# Altium PCB PCB1.PcbDoc
Units mil, origin at the board's own origin, x right, y up, seen from the top; angles counter-clockwise.
Board outline 7035.03 x 5525.03 mil, 2 copper layers (Top Layer, Bottom Layer); 52 components, 110 nets, 324 pads, 2 vias.
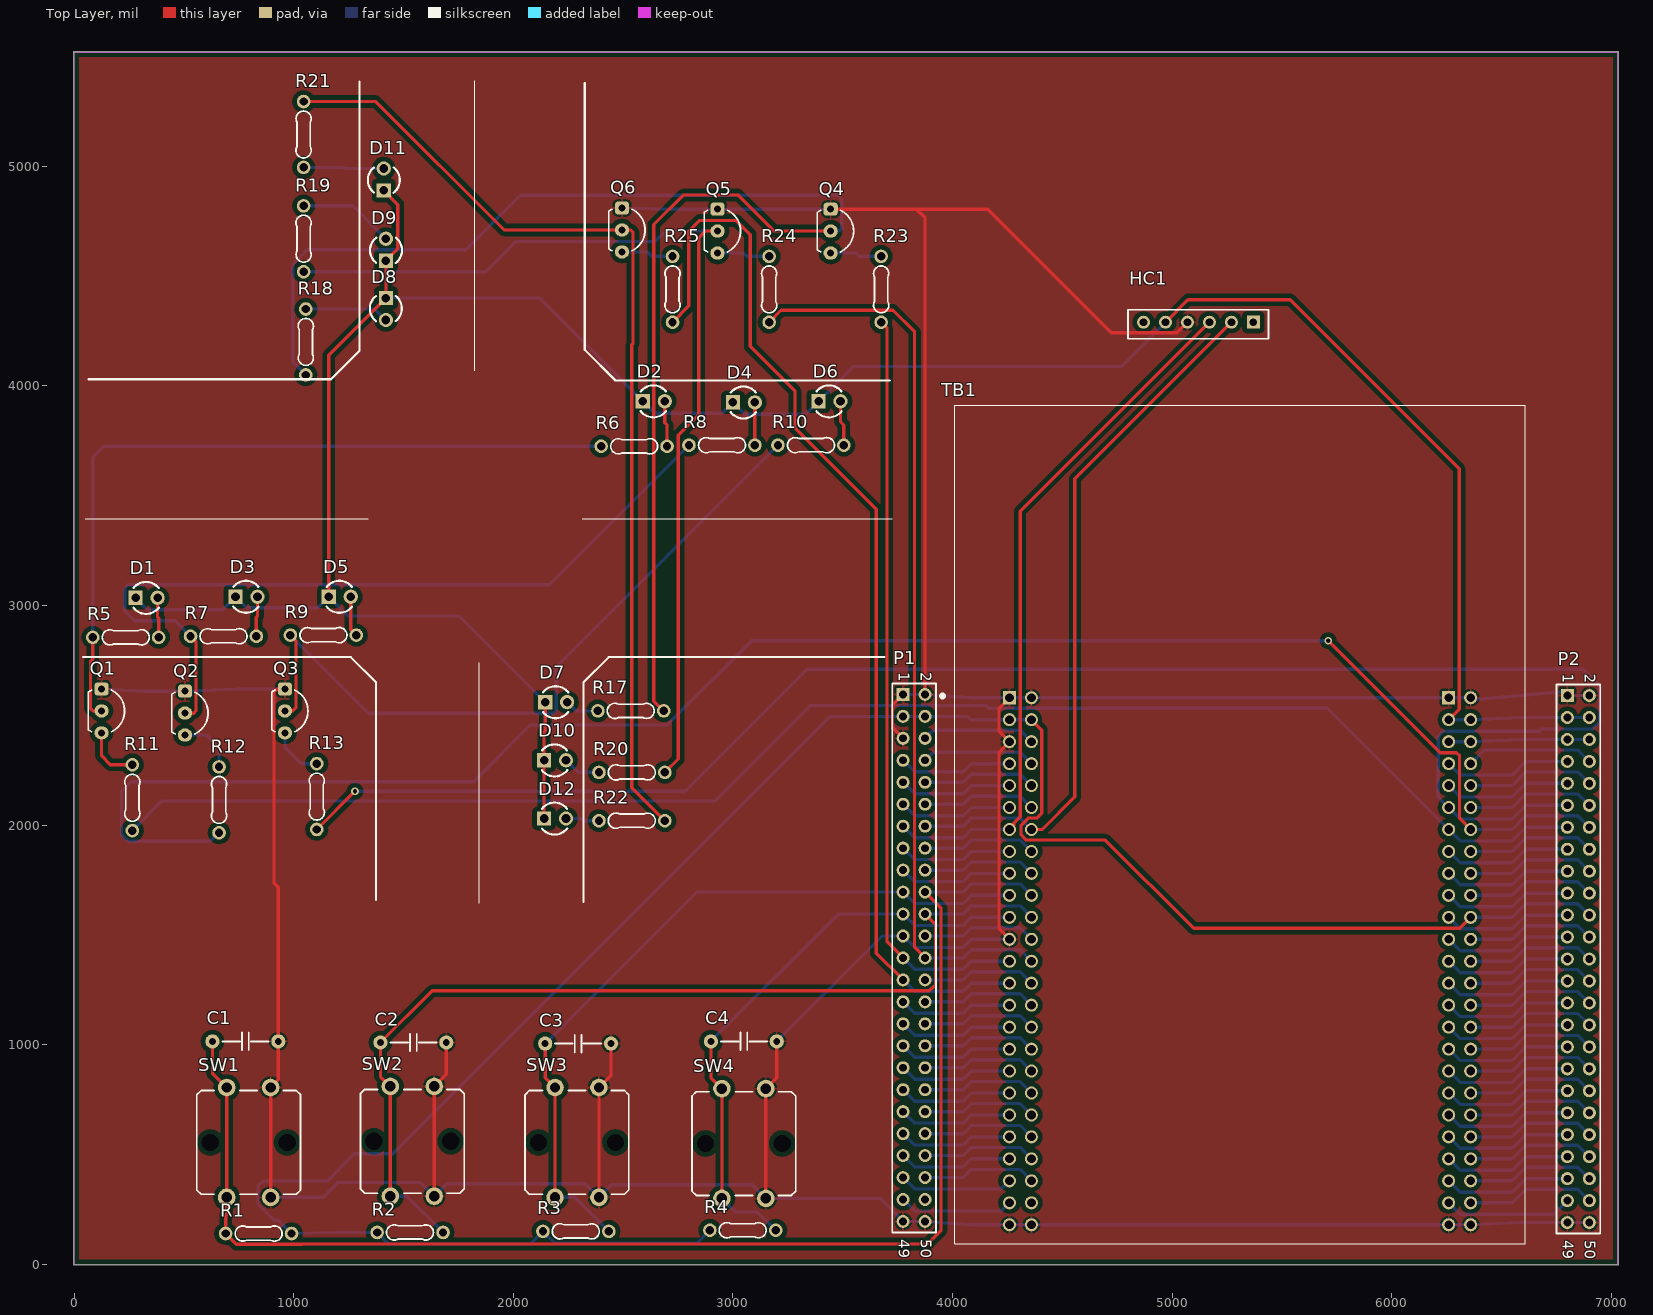
[diagram p0: Top Layer view]
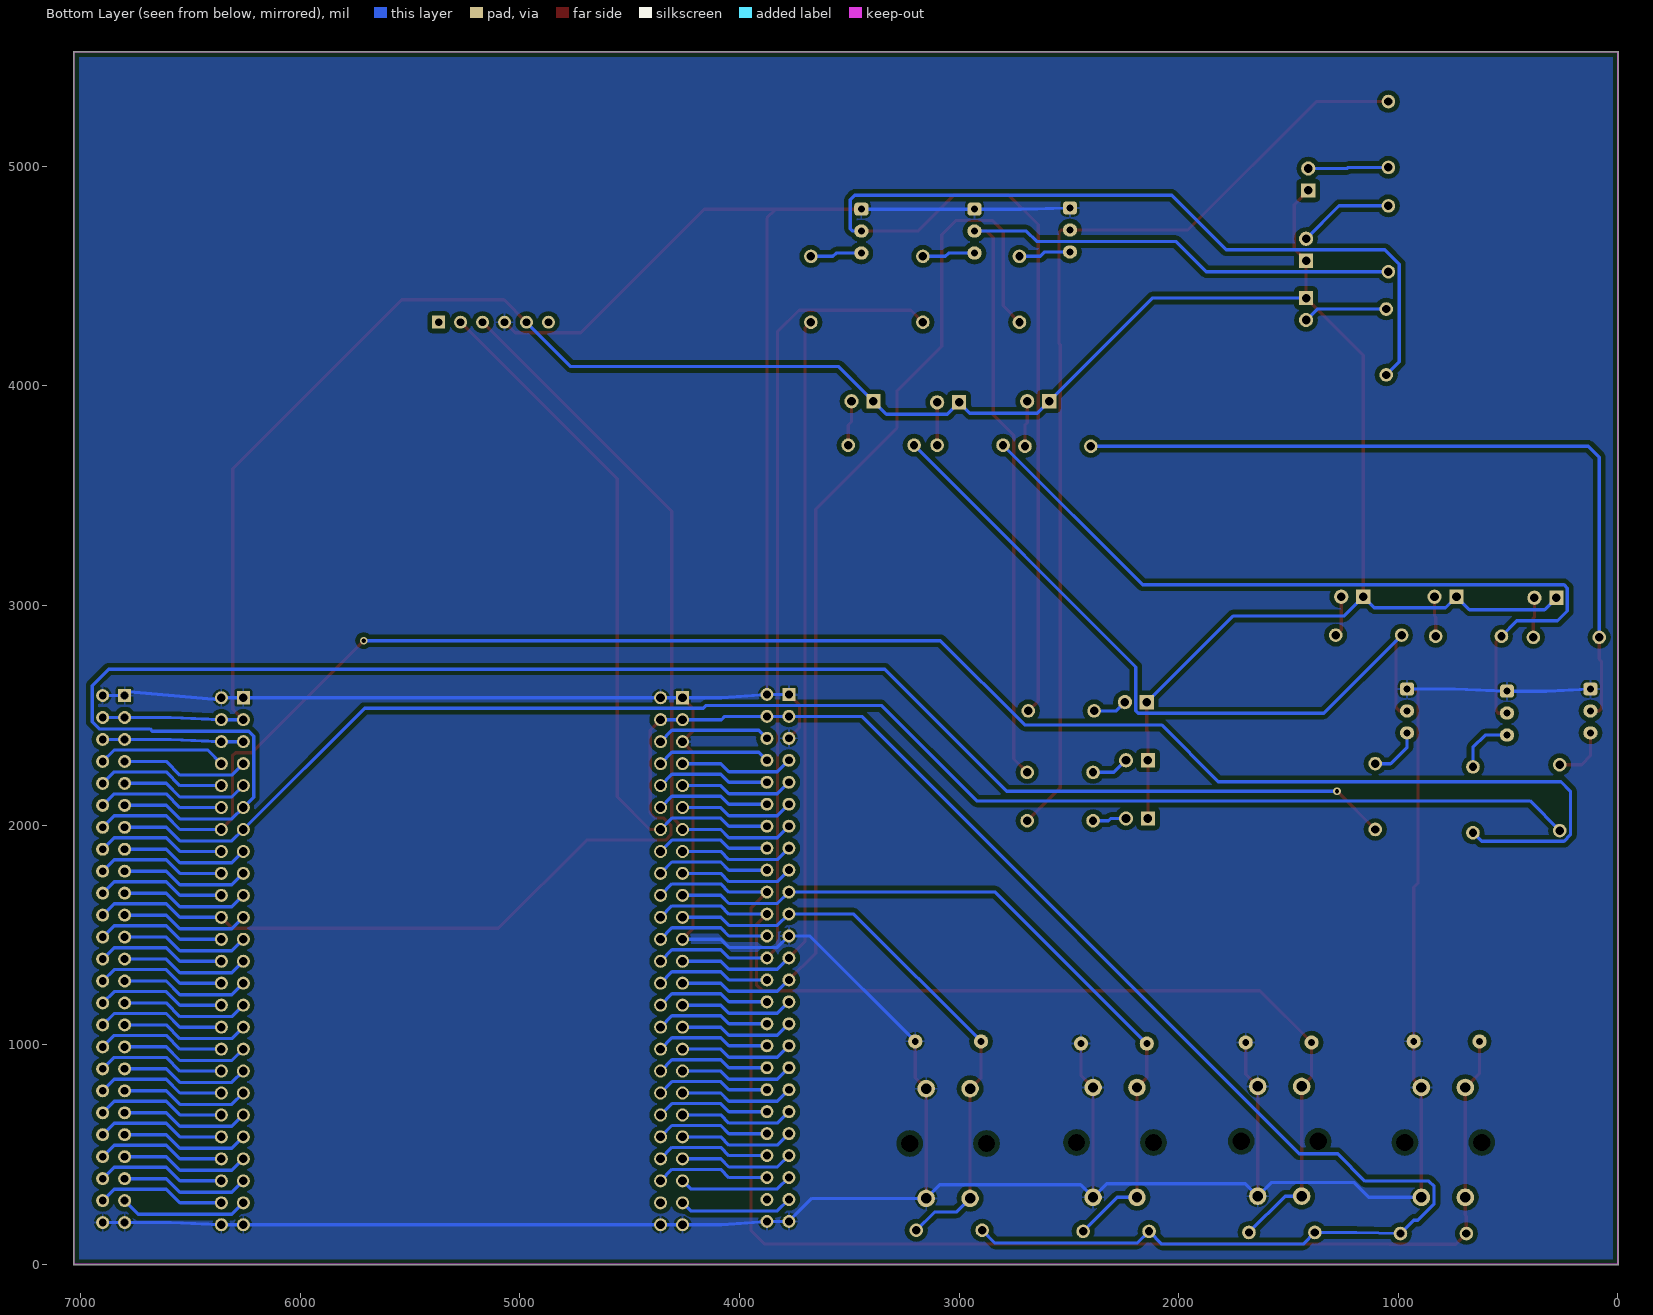
[diagram p1: Bottom Layer view, seen from below]
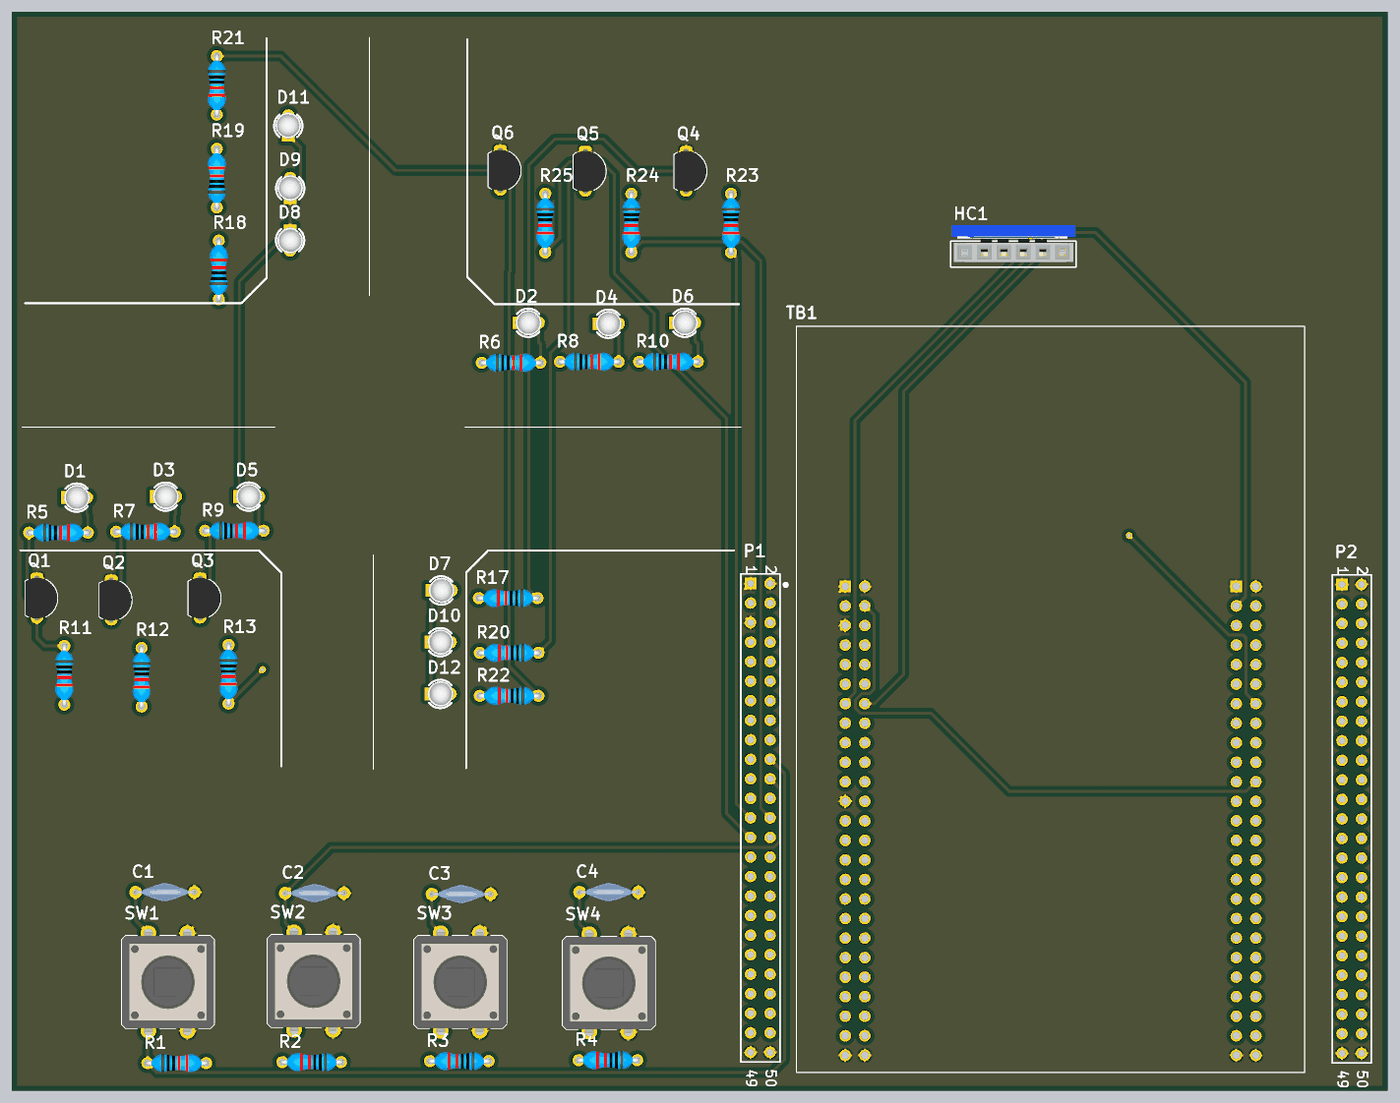
[diagram p2: 3D render of the assembled board from above, using the file's embedded part models]

## Layer stack, top to bottom
Top Solder: solder mask 0.4, Solder Resist, Dk 3.5
Top Layer: signal copper 1.4
Dielectric 1: dielectric 12.6, FR-4, Dk 4.8
Bottom Layer: signal copper 1.4
Bottom Solder: solder mask 0.4, Solder Resist, Dk 3.5

## Board outline
-2.51,0 ccw(c0,0) 0,-2.52 7030,-2.52 ccw(c7030,0) 7032.51,0 7032.51,5520 ccw(c7030,5520) 7030,5522.52 0,5522.52 ccw(c0,5520) -2.51,5520

## Design rules (kind name [scope] priority, off if disabled: settings)
Clearance [All] p1: gap=20 ignorepadtopadclearanceinfootprint=FALSE
PolygonConnect [All] p1: connectstyle=Relief reliefconductorwidth=10 reliefentries=4 polygonreliefangle="90 Angle" airgapwidth=10
RoutingVias [All] p1: holewidth=20 width=35 viastyle="Through Hole" minholewidth=15 minwidth=25 maxholewidth=28 maxwidth=50
SolderMaskExpansion [All] p1: expansion=4
Width [All] p1: maxlimit=40 minlimit=10 preferedwidth=15
30 further rules are at their usual default settings.

## Components (designator, comment, footprint, x,y, rotation, side; value= is the part's Value field where it differs from the comment)
C1 "104" "CAP Ceramic/W300" 630,1015 r0 top
C2 "104" "CAP Ceramic/W300" 1395,1010 r0 top
C3 "104" "CAP Ceramic/W300" 2145,1005 r0 top
C4 "104" "CAP Ceramic/W300" 2900,1015 r0 top
D1 "Led" "LED 3MM - green" 330,3035 r0 top
D2 "Led" "LED 3MM - green" 2640,3930 r0 top
D3 "Led" "LED 3MM - yellow" 785,3040 r0 top
D4 "Led" "LED 3MM - yellow" 3050,3925 r0 top
D5 "Led" "LED 3MM - red" 1210,3040 r0 top
D6 "Led" "LED 3MM - red" 3440,3930 r0 top
D7 "Led" "LED 3MM - green" 2195,2560 r0 top
D8 "Led" "LED 3MM - green" 1420,4350 r270 top
D9 "Led" "LED 3MM - yellow" 1420,4620 r90 top
D10 "Led" "LED 3MM - yellow" 2190,2295 r0 top
D11 "Led" "LED 3MM - red" 1410,4940 r90 top
D12 "Led" "LED 3MM - red" 2190,2030 r0 top
HC1 "HC05 Bluetooth" "HC05 Bluethooth Dung" 5370,4290 r180 top value="Connector 6"
P1 "Header 25X2" HDR2X25 3775,2595 r270 top
P2 "Header 25X2" HDR2X25 6800,2590 r270 top
Q1 "Transistor NPN" TO-92/W100 125,2520 r270 top
Q2 "Transistor NPN" TO-92/W100 505,2510 r270 top
Q3 "Transistor NPN" TO-92/W100 960,2520 r270 top
Q4 "Transistor NPN" TO-92/W100 3445,4705 r270 top
Q5 "Transistor NPN" TO-92/W100 2930,4705 r270 top
Q6 "Transistor NPN" TO-92/W100 2495,4710 r270 top
R1 "10k" "R 1/4W/300" 690,140 r0 top
R2 "10k" "R 1/4W/300" 1680,145 r180 top
R3 "10k" "R 1/4W/300" 2435,150 r180 top
R4 "10k" "R 1/4W/300" 3195,155 r180 top
R5 "220" "R 1/4W/300" 85,2855 r0 top
R6 "220" "R 1/4W/300" 2400,3725 r0 top
R7 "220" "R 1/4W/300" 530,2860 r0 top
R8 "220" "R 1/4W/300" 2800.01,3730 r0 top
R9 "220" "R 1/4W/300" 985,2865 r0 top
R10 "220" "R 1/4W/300" 3205,3730 r0 top
R11 "1k" "R 1/4W/300" 265,2275 r270 top
R12 "1k" "R 1/4W/300" 660,2265 r270 top
R13 "1k" "R 1/4W/300" 1105,2280 r270 top
R17 "220" "R 1/4W/300" 2685,2520 r180 top
R18 "220" "R 1/4W/300" 1055,4050 r90 top
R19 "220" "R 1/4W/300" 1045,4520 r90 top
R20 "220" "R 1/4W/300" 2690,2240 r180 top
R21 "220" "R 1/4W/300" 1045,5295 r270 top
R22 "220" "R 1/4W/300" 2690,2020 r180 top
R23 "1k" "R 1/4W/300" 3675,4590 r270 top
R24 "1k" "R 1/4W/300" 3165,4590 r270 top
R25 "1k" "R 1/4W/300" 2725,4590 r270 top
SW1 "Button" SW/4/12mm 795,555 r0 top
SW2 "Button" SW/4/12mm 1540,560 r0 top
SW3 "Button" SW/4/12mm 2290,555 r0 top
SW4 "Button" SW/4/12mm 3050,550 r0 top
TB1 "STM32F4DISCOVERY" MODULE_STM32F4DISCOVERY 5309.42,2002.05 r0 top

## Footprints (in the part's own frame and the unit in brackets; to place one, negate y for a bottom-side part, rotate by r counter-clockwise, add the part's x,y. Pads: shape width x height; smd on the part's side, far side on the other; paste and mask are expansions set on the pad)
"CAP Ceramic/W300" [mil]
  round 65 hole 31: 1(0,0) 2(300,0)
  silkscreen extent 45,-40 255,40, body extent -8,-47 307,47, height 340
"HC05 Bluethooth Dung" [mm] "Connector; Header; 6 Position"
  rect 1.5x1.5 hole 0.9: 1(0,0)
  round 1.5 hole 0.9: 2(2.54,0) 3(5.08,0) 4(7.62,0) 5(10.16,0) 6(12.7,0)
  silkscreen extent -1.76,-1.46 14.51,1.91, body extent -1.65,-3.56 14.35,1.26, height 38
HDR2X25 [mm] "Connector; Header; 25x2 Position"
  rect 1.5x1.5 hole 0.9: 1(0,0)
  round 1.5 hole 0.9: 2(0,2.54) 3(2.54,0) 4(2.54,2.54) 5(5.08,0) 6(5.08,2.54) 7(7.62,0) 8(7.62,2.54) 9(10.16,0) 10(10.16,2.54) 11(12.7,0) 12(12.7,2.54) 13(15.24,0) 14(15.24,2.54) 15(17.78,0) 16(17.78,2.54) 17(20.32,0) 18(20.32,2.54) 19(22.86,0) 20(22.86,2.54) 21(25.4,0) 22(25.4,2.54) 23(27.94,0) 24(27.94,2.54) 25(30.48,0) 26(30.48,2.54) 27(33.02,0) 28(33.02,2.54) 29(35.56,0) 30(35.56,2.54) 31(38.1,0) 32(38.1,2.54) 33(40.64,0) 34(40.64,2.54) 35(43.18,0) 36(43.18,2.54) 37(45.72,0) 38(45.72,2.54) 39(48.26,0) 40(48.26,2.54) 41(50.8,0) 42(50.8,2.54) 43(53.34,0) 44(53.34,2.54) 45(55.88,0) 46(55.88,2.54) 47(58.42,0) 48(58.42,2.54) 49(60.96,0) 50(60.96,2.54)
  silkscreen extent -1.27,-1.27 62.23,3.81
"LED 3MM - green" [mil]
  rect 65x65 hole 39: 1(-50,0)
  round 65 hole 39: 2(50,0)
  silkscreen extent -60,-73 55,72, body extent -66,-65 64,65, height 207
"LED 3MM - red" [mil]
  rect 65x65 hole 39: 1(-50,0)
  round 65 hole 39: 2(50,0)
  silkscreen extent -60,-73 55,72, body extent -66,-65 64,65, height 207
"LED 3MM - yellow" [mil]
  rect 65x65 hole 39: 1(-50,0)
  round 65 hole 39: 2(50,0)
  silkscreen extent -60,-73 55,72, body extent -66,-65 64,65, height 207
MODULE_STM32F4DISCOVERY [mm]
  rect 1.508x1.508 hole 1: P1_1(-26.67,14.68) P2_1(24.13,14.68)
  round 1.508 hole 1: P1_2(-24.13,14.68) P1_3(-26.67,12.14) P1_4(-24.13,12.14) P1_5(-26.67,9.6) P1_6(-24.13,9.6) P1_7(-26.67,7.06) P1_8(-24.13,7.06) P1_9(-26.67,4.52) P1_10(-24.13,4.52) P1_11(-26.67,1.98) P1_12(-24.13,1.98) P1_13(-26.67,-0.56) P1_14(-24.13,-0.56) P1_15(-26.67,-3.1) P1_16(-24.13,-3.1) P1_17(-26.67,-5.64) P1_18(-24.13,-5.64) P1_19(-26.67,-8.18) P1_20(-24.13,-8.18) P1_21(-26.67,-10.72) P1_22(-24.13,-10.72) P1_23(-26.67,-13.26) P1_24(-24.13,-13.26) P1_25(-26.67,-15.8) P1_26(-24.13,-15.8) P1_27(-26.67,-18.34) P1_28(-24.13,-18.34) P1_29(-26.67,-20.88) P1_30(-24.13,-20.88) P1_31(-26.67,-23.42) P1_32(-24.13,-23.42) P1_33(-26.67,-25.96) P1_34(-24.13,-25.96) P1_35(-26.67,-28.5) P1_36(-24.13,-28.5) P1_37(-26.67,-31.04) P1_38(-24.13,-31.04) P1_39(-26.67,-33.58) P1_40(-24.13,-33.58) P1_41(-26.67,-36.12) P1_42(-24.13,-36.12) P1_43(-26.67,-38.66) P1_44(-24.13,-38.66) P1_45(-26.67,-41.2) P1_46(-24.13,-41.2) P1_47(-26.67,-43.74) P1_48(-24.13,-43.74) P1_49(-26.67,-46.28) P1_50(-24.13,-46.28) P2_2(26.67,14.68) P2_3(24.13,12.14) P2_4(26.67,12.14) P2_5(24.13,9.6) P2_6(26.67,9.6) P2_7(24.13,7.06) P2_8(26.67,7.06) P2_9(24.13,4.52) P2_10(26.67,4.52) P2_11(24.13,1.98) P2_12(26.67,1.98) P2_13(24.13,-0.56) P2_14(26.67,-0.56) P2_15(24.13,-3.1) P2_16(26.67,-3.1) P2_17(24.13,-5.64) P2_18(26.67,-5.64) P2_19(24.13,-8.18) P2_20(26.67,-8.18) P2_21(24.13,-10.72) P2_22(26.67,-10.72) P2_23(24.13,-13.26) P2_24(26.67,-13.26) P2_25(24.13,-15.8) P2_26(26.67,-15.8) P2_27(24.13,-18.34) P2_28(26.67,-18.34) P2_29(24.13,-20.88) P2_30(26.67,-20.88) P2_31(24.13,-23.42) P2_32(26.67,-23.42) P2_33(24.13,-25.96) P2_34(26.67,-25.96) P2_35(24.13,-28.5) P2_36(26.67,-28.5) P2_37(24.13,-31.04) P2_38(26.67,-31.04) P2_39(24.13,-33.58) P2_40(26.67,-33.58) P2_41(24.13,-36.12) P2_42(26.67,-36.12) P2_43(24.13,-38.66) P2_44(26.67,-38.66) P2_45(24.13,-41.2) P2_46(26.67,-41.2) P2_47(24.13,-43.74) P2_48(26.67,-43.74) P2_49(24.13,-46.28) P2_50(26.67,-46.28)
  silkscreen extent -34.61,-48.5 33,48.5
"R 1/4W/300" [mil] "Through hole resitor, axial 300mils, 1/4W"
  round 62 hole 38: 1(0,0) 2(300,0)
  silkscreen extent 44,-35 257,35, body extent -12,-47 312,47, height 97
SW/4/12mm [mil]
  round 80 hole 47.24: 1(-100,250) 2(-100,-250) 3(100,-250) 4(100,250)
  round 0 hole 78.74: HOLE(-175,0) HOLE(175,0)
  silkscreen extent -236,-236 236,236, body extent -236,-257 236,255, height 287
TO-92/W100 [mil]
  rrect50% 60x65 hole 31: 1(-100,0)
  oval 60x65 hole 31: 2(0,0) 3(100,0)
  silkscreen extent -95,-60 95,105, body extent -114,-60 112,105, height 370

## Part data
C1 C2 C3 C4: library part "Capacitor NP", "Capacitor non-pol"
D1 D2 D3 D4 D5 D6 D7 D8 D9 D10 D11 D12: "Typical LED"
HC1: "Bluetooth HC05"
P1 P2: "Header, 25-Pin, Dual row", LatestRevisionDate=17-Jul-2002, LatestRevisionNote="Re-released for DXP Platform.", Publisher="Altium Limited"
Q1 Q2 Q3 Q4 Q5 Q6: "NPN Bipolar Transistor"
R1 R2 R3 R4 R5 R6 R7 R8 R9 R10 R11 R12 R13 R17 R18 R19 R20 R21 R22 R23 R24 R25: library part Resistor, "Resistor"
SW1 SW2 SW3 SW4: library part "SW SPST 4-pin", "Tact switch 4-pin"
TB1: "Development kit: ARM ST; pin strips, pin header; No.of", PACKAGE=None, Availability=Unavailable, MP=STM32F4DISCOVERY, Price=None

## Via types
v1: diameter 35, hole 20, Top Layer to Bottom Layer, 2 vias

## Nets (pads, with @x,y where several pads share a name; then routed paths per layer and width w, separated by ;. In a path a pad name is that pad's centre, name@x,y a point inside that pad or via, vN(x,y) a via of type N, cw(c..) or ccw(c..) an arc to the next point about the centre after c; other vN are vias at no path point)
3V: P2.5 P2.6 TB1.P2_5 TB1.P2_6 | length 640.8
  Bottom Layer w15: TB1.P2_5 TB1.P2_6 6590,2390 P2.5 P2.6
5V: D1.1 D2.1 D3.1 D4.1 D5.1 D6.1 D7.1 D8.1 D9.1 D10.1 D11.1 D12.1 HC1.5 P2.3 P2.4 TB1.P2_3 TB1.P2_4 | length 12175.2
  Top Layer w15: D5.1 1160,4140 D8.1 D9.1 1474,4624 1474,4826 D11.1 ; D12.1 D10.1 2140,2425 2145,2430 D7.1 ; HC1.5 5072,4392 5538,4392 6307,3623 6307,2527.58 TB1.P2_3
  Bottom Layer w15: D1.1 334,2981 676,2981 D3.1 785,2990 1110,2990 D5.1 1248,2952 1753,2952 D7.1 ; D8.1 2120,4400 D2.1 2644,3876 2951,3876 D4.1 3054,3871 3331,3871 D6.1 3548,4088 4768,4088 HC1.5 ; TB1.P2_3 TB1.P2_4 6590,2490 P2.3 P2.4
BOOT0: P2.21 TB1.P2_21 | length 587.8
  Bottom Layer w15: TB1.P2_21 6311.42,1528 6548,1528 6610,1590 P2.21
GND: C1.2 C2.2 C3.2 C4.2 HC1.4 P1.1 P1.2 P1.5 P1.23 P1.49 P1.50 P2.1 P2.2 P2.49 P2.50 Q1.1 Q2.1 Q3.1 Q4.1 Q5.1 Q6.1 SW1.3 SW1.4 SW2.3 SW2.4 SW3.3 SW3.4 SW4.3 SW4.4 TB1.P1_1 TB1.P1_2 TB1.P1_5 TB1.P1_23 TB1.P1_49 TB1.P1_50 TB1.P2_1 TB1.P2_2 TB1.P2_49 TB1.P2_50 | length 22501.8
  Top Layer w15: SW1.3 SW1.4 930,840 C1.2 930,1717 910,1737 910,2605 925,2620 Q3.1 ; SW2.3 SW2.4 1695,865 C2.2 ; SW3.3 SW3.4 2445,860 C3.2 ; SW4.3 SW4.4 3200,850 C4.2 ; Q4.1 3835,4805 ; P1.5 3727,2443 3727,2547 P1.1 ; P1.2 3875,4765 3835,4805 ; TB1.P1_23 4212,1527.42 4212,2332.58 TB1.P1_5 4212,2427.42 4212,2532.58 TB1.P1_1 ; HC1.4 5022,4242 4723,4242 4160,4805 3835,4805
  Bottom Layer w15: Q1.1 325,2610 Q2.1 743,2620 Q3.1 ; SW1.3 1134,305 1201,372 1578,372 SW2.3 1697,367 2328,367 SW3.3 2447,362 3088,362 SW4.3 3670,300 P1.49 P1.50 4082,180 TB1.P1_49 TB1.P1_50 TB1.P2_49 TB1.P2_50 6590,190 P2.49 P2.50 ; Q6.1 2718,4805 Q5.1 Q4.1 ; C4.2 3680,1495 P1.23 3827,1443 4048,1443 4085,1480 TB1.P1_23 ; P1.1 P1.2 4082,2580 TB1.P1_1 TB1.P1_2 TB1.P2_1 TB1.P2_2 6368.77,2571.42 6779.61,2607.13 P2.1 P2.2
NetD1_2: D1.2 R5.2 | length 182.1
  Top Layer w15: D1.2 380,2947 385,2942 R5.2
NetD2_2: D2.2 R6.2 | length 209.1
  Top Layer w15: D2.2 2690,3832 2700,3822 R6.2
NetD3_2: D3.2 R7.2 | length 182.1
  Top Layer w15: R7.2 830,2947 835,2952 D3.2
NetD4_2: D4.2 R8.2 | length 195
  Top Layer w15: R8.2 3100.01,3827 D4.2
NetD5_2: D5.2 R9.2 | length 185.4
  Top Layer w15: D5.2 1260,2890 R9.2
NetD6_2: D6.2 R10.2 | length 206.2
  Top Layer w15: D6.2 3490,3837 3505,3822 R10.2
NetD7_2: D7.2 R17.2 | length 156.6
  Bottom Layer w15: D7.2 2285,2520 R17.2
NetD8_2: D8.2 R18.2 | length 385.7
  Bottom Layer w15: R18.2 1370,4350 D8.2
NetD9_2: D9.2 R19.2 | length 437.1
  Bottom Layer w15: R19.2 1270,4820 D9.2
NetD10_2: D10.2 R20.2 | length 172.8
  Bottom Layer w15: D10.2 2295,2240 R20.2
NetD11_2: D11.2 R21.2 | length 367.1
  Bottom Layer w15: R21.2 1228,4995 1233,4990 D11.2
NetD12_2: D12.2 R22.2 | length 154.1
  Bottom Layer w15: D12.2 2310,2030 2320,2020 R22.2
NetQ1_1: Q1.3 R11.1 | length 261.6
  Top Layer w15: Q1.3 125,2315 165,2275 R11.1
NetQ1_3: Q1.2 R5.1 R6.1 | length 3539
  Top Layer w15: R5.1 85,2756 75,2746 75,2530 85,2520 Q1.2
  Bottom Layer w15: R5.1 85,3675 135,3725 R6.1
NetQ2_1: Q2.3 R12.1 | length 267.8
  Bottom Layer w15: Q2.3 605,2410 660,2355 R12.1
NetQ2_3: Q2.2 R7.1 R8.1 | length 3695.8
  Top Layer w15: Q2.2 545,2510 555,2520 555,2835 R7.1
  Bottom Layer w15: R7.1 460,2930 275,2930 230,2975 230,3079 245,3094 2164.01,3094 R8.1
NetQ3_1: Q3.3 R13.1 | length 241.1
  Bottom Layer w15: Q3.3 960,2355 1035,2280 R13.1
NetQ3_3: Q3.2 R9.1 R10.1 | length 3386.1
  Top Layer w15: Q3.2 995,2520 1010,2535 1010,2840 R9.1
  Bottom Layer w15: R9.1 1340,2510 2185,2510 2195,2520 2195,2720 R10.1
NetQ4_1: Q4.3 R23.1 | length 236.2
  Bottom Layer w15: Q4.3 3560,4605 3575,4590 R23.1
NetQ4_3: Q4.2 R17.1 R18.1 | length 6515.6
  Top Layer w15: R17.1 2640,2565 2640,4735 2774,4869 3024,4869 3188,4705 Q4.2
  Bottom Layer w15: R18.1 996,4109 996,4555 1061,4620 1784,4620 2032,4868 3475,4868 3495,4848 3495,4715 3485,4705 Q4.2
NetQ5_1: Q5.3 R24.1 | length 241.2
  Bottom Layer w15: Q5.3 3047,4605 3062,4590 R24.1
NetQ5_3: Q5.2 R19.1 R20.1 | length 4558.3
  Top Layer w15: R20.1 2751,2301 2751,3775 2845,3869 2845,4675 2875,4705 Q5.2
  Bottom Layer w15: R19.1 1875,4520 2013,4658 2647,4658 2694,4705 Q5.2
NetQ6_1: Q6.3 R25.1 | length 238.3
  Bottom Layer w15: Q6.3 2610,4610 2630,4590 R25.1
NetQ6_3: Q6.2 R21.1 R22.1 | length 4490.7
  Top Layer w15: R21.1 1373,5295 1958,4710 Q6.2 2535,4710 2545,4700 2545,4192 2540,4187 2540,2170 R22.1
NRST: P1.6 TB1.P1_6 | length 521.3
  Bottom Layer w15: P1.6 3912,2432 4307.42,2432 TB1.P1_6
PA0: P1.12 TB1.P1_12 | length 521.3
  Bottom Layer w15: P1.12 4048,2095 4085,2132 4307.42,2132 TB1.P1_12
PA1: P1.11 TB1.P1_11 | length 521.3
  Bottom Layer w15: P1.11 3827,2043 4048,2043 4085,2080 TB1.P1_11
PA2: HC1.2 P1.14 TB1.P1_14 | length 3237.4
  Top Layer w15: TB1.P1_14 4408.78,1980 4557,2128.22 4557,3577 HC1.2
  Bottom Layer w15: P1.14 4048,1995 4085,2032 4307.42,2032 TB1.P1_14
PA3: HC1.3 P1.13 TB1.P1_13 | length 3208.5
  Top Layer w15: TB1.P1_13 4278.95,1999.53 4278.95,2007.52 4309,2037.57 4309,3429 HC1.3
  Bottom Layer w15: P1.13 3827,1943 4048,1943 4085,1980 TB1.P1_13
PA4: P1.16 TB1.P1_16 | length 521.3
  Bottom Layer w15: P1.16 4048,1895 4085,1932 4307.42,1932 TB1.P1_16
PA5: P1.15 TB1.P1_15 | length 521.3
  Bottom Layer w15: P1.15 3827,1843 4048,1843 4085,1880 TB1.P1_15
PA6: P1.18 TB1.P1_18 | length 521.3
  Bottom Layer w15: P1.18 4048,1795 4085,1832 4307.42,1832 TB1.P1_18
PA7: P1.17 TB1.P1_17 | length 521.3
  Bottom Layer w15: P1.17 3827,1743 4048,1743 4085,1780 TB1.P1_17
PA8: P2.43 TB1.P2_43 | length 587.8
  Bottom Layer w15: TB1.P2_43 6311.42,428 6548,428 6610,490 P2.43
PA9: P2.44 TB1.P2_44 | length 587.8
  Bottom Layer w15: TB1.P2_44 6548,480 6610,542 6848,542 P2.44
PA10: P2.41 TB1.P2_41 | length 587.8
  Bottom Layer w15: TB1.P2_41 6311.42,528 6548,528 6610,590 P2.41
PA13: P2.42 TB1.P2_42 | length 587.8
  Bottom Layer w15: TB1.P2_42 6548,580 6610,642 6848,642 P2.42
PA14: P2.39 TB1.P2_39 | length 587.8
  Bottom Layer w15: TB1.P2_39 6311.42,628 6548,628 6610,690 P2.39
PA15: P2.40 TB1.P2_40 | length 587.8
  Bottom Layer w15: TB1.P2_40 6548,680 6610,742 6848,742 P2.40
PB0: C2.1 P1.22 R2.1 SW2.1 SW2.2 TB1.P1_22 | length 4527.1
  Top Layer w15: SW2.2 SW2.1 1395,855 C2.1 1630,1245 3895,1245 3923,1273 3923,1547 P1.22
  Bottom Layer w15: SW2.2 1515,310 R2.1 ; P1.22 4048,1595 4085,1632 4307.42,1632 TB1.P1_22
PB1: C4.1 P1.21 R4.1 SW4.1 SW4.2 TB1.P1_21 | length 2677.3
  Top Layer w15: C4.1 2900,850 SW4.1 SW4.2
  Bottom Layer w15: C4.1 3480,1595 P1.21 3827,1543 4048,1543 4085,1580 TB1.P1_21 ; SW4.2 3012,238 3112,238 R4.1
PB2: P1.24 TB1.P1_24 | length 521.3
  Bottom Layer w15: P1.24 4048,1495 4085,1532 4307.42,1532 TB1.P1_24
PB3: P2.28 TB1.P2_28 | length 587.8
  Bottom Layer w15: TB1.P2_28 6548,1280 6610,1342 6848,1342 P2.28
PB4: P2.25 TB1.P2_25 | length 587.8
  Bottom Layer w15: TB1.P2_25 6311.42,1328 6548,1328 6610,1390 P2.25
PB5: P2.26 TB1.P2_26 | length 587.8
  Bottom Layer w15: TB1.P2_26 6548,1380 6610,1442 6848,1442 P2.26
PB6: P2.23 TB1.P2_23 | length 587.8
  Bottom Layer w15: TB1.P2_23 6311.42,1428 6548,1428 6610,1490 P2.23
PB7: P2.24 TB1.P2_24 | length 587.8
  Bottom Layer w15: TB1.P2_24 6548,1480 6610,1542 6848,1542 P2.24
PB8: P2.19 TB1.P2_19 | length 587.8
  Bottom Layer w15: TB1.P2_19 6311.42,1628 6548,1628 6610,1690 P2.19
PB9: P2.20 TB1.P2_20 | length 587.8
  Bottom Layer w15: TB1.P2_20 6548,1680 6610,1742 6848,1742 P2.20
PB10: P1.34 TB1.P1_34 | length 521.3
  Bottom Layer w15: P1.34 4048,995 4085,1032 4307.42,1032 TB1.P1_34
PB11: P1.35 TB1.P1_35 | length 521.3
  Bottom Layer w15: P1.35 3827,843 4048,843 4085,880 TB1.P1_35
PB12: P1.36 TB1.P1_36 | length 521.3
  Bottom Layer w15: P1.36 4048,895 4085,932 4307.42,932 TB1.P1_36
PB13: P1.37 TB1.P1_37 | length 521.3
  Bottom Layer w15: P1.37 3827,743 4048,743 4085,780 TB1.P1_37
PB14: P1.38 TB1.P1_38 | length 521.3
  Bottom Layer w15: P1.38 4048,795 4085,832 4307.42,832 TB1.P1_38
PB15: P1.39 TB1.P1_39 | length 521.3
  Bottom Layer w15: P1.39 3827,643 4048,643 4085,680 TB1.P1_39
PC0: P1.8 TB1.P1_8 | length 521.3
  Bottom Layer w15: P1.8 3912,2332 4307.42,2332 TB1.P1_8
PC1: P1.7 TB1.P1_7 | length 521.3
  Bottom Layer w15: P1.7 3827,2243 4048,2243 4085,2280 TB1.P1_7
PC2: P1.10 TB1.P1_10 | length 521.3
  Bottom Layer w15: P1.10 4048,2195 4085,2232 4307.42,2232 TB1.P1_10
PC3: P1.9 TB1.P1_9 | length 521.3
  Bottom Layer w15: P1.9 3827,2143 4048,2143 4085,2180 TB1.P1_9
PC4: C1.1 P1.20 R1.1 SW1.1 SW1.2 TB1.P1_20 | length 6300.3
  Top Layer w15: C1.1 630,870 SW1.1 SW1.2 695,225 690,220 R1.1 739,91 1039,91 1040,92 3885,92 3948,155 3948,1622 P1.20
  Bottom Layer w15: P1.20 4048,1695 4085,1732 4307.42,1732 TB1.P1_20
PC5: C3.1 P1.19 R3.1 SW3.1 SW3.2 TB1.P1_19 | length 3464.9
  Top Layer w15: C3.1 2145,850 SW3.1 SW3.2
  Bottom Layer w15: C3.1 2835,1695 P1.19 3827,1643 4048,1643 4085,1680 TB1.P1_19 ; SW3.2 2280,305 R3.1
PC6: P2.47 TB1.P2_47 | length 587.8
  Bottom Layer w15: TB1.P2_47 6311.42,228 6738,228 P2.47
PC7: P2.48 TB1.P2_48 | length 587.8
  Bottom Layer w15: TB1.P2_48 6548,280 6610,342 6848,342 P2.48
PC8: P2.45 TB1.P2_45 | length 587.8
  Bottom Layer w15: TB1.P2_45 6311.42,328 6548,328 6610,390 P2.45
PC9: P2.46 TB1.P2_46 | length 587.8
  Bottom Layer w15: TB1.P2_46 6548,380 6610,442 6848,442 P2.46
PC10: P2.37 TB1.P2_37 | length 587.8
  Bottom Layer w15: TB1.P2_37 6311.42,728 6548,728 6610,790 P2.37
PC11: P2.38 TB1.P2_38 | length 587.8
  Bottom Layer w15: TB1.P2_38 6548,780 6610,842 6848,842 P2.38
PC12: P2.35 TB1.P2_35 | length 587.8
  Bottom Layer w15: TB1.P2_35 6311.42,828 6548,828 6610,890 P2.35
PC13: P2.12 TB1.P2_12 | length 587.8
  Bottom Layer w15: TB1.P2_12 6548,2080 6610,2142 6848,2142 P2.12
PC14: P2.9 TB1.P2_9 | length 587.8
  Bottom Layer w15: TB1.P2_9 6311.42,2128 6548,2128 6610,2190 P2.9
PC15: P2.10 TB1.P2_10 | length 587.8
  Bottom Layer w15: TB1.P2_10 6548,2180 6610,2242 6848,2242 P2.10
PD0: P2.36 TB1.P2_36 | length 587.8
  Bottom Layer w15: TB1.P2_36 6548,880 6610,942 6848,942 P2.36
PD1: P2.33 TB1.P2_33 | length 587.8
  Bottom Layer w15: TB1.P2_33 6311.42,928 6548,928 6610,990 P2.33
PD2: P2.34 TB1.P2_34 | length 587.8
  Bottom Layer w15: TB1.P2_34 6548,980 6610,1042 6848,1042 P2.34
PD3: P2.31 TB1.P2_31 | length 587.8
  Bottom Layer w15: TB1.P2_31 6311.42,1028 6548,1028 6610,1090 P2.31
PD4: P2.32 TB1.P2_32 | length 587.8
  Bottom Layer w15: TB1.P2_32 6548,1080 6610,1142 6848,1142 P2.32
PD5: P2.29 TB1.P2_29 | length 587.8
  Bottom Layer w15: TB1.P2_29 6311.42,1128 6548,1128 6610,1190 P2.29
PD6: P2.30 TB1.P2_30 | length 587.8
  Bottom Layer w15: TB1.P2_30 6548,1180 6610,1242 6848,1242 P2.30
PD7: P2.27 TB1.P2_27 | length 587.8
  Bottom Layer w15: TB1.P2_27 6311.42,1228 6548,1228 6610,1290 P2.27
PD8: P1.40 TB1.P1_40 | length 521.3
  Bottom Layer w15: P1.40 4048,695 4085,732 4307.42,732 TB1.P1_40
PD9: P1.41 TB1.P1_41 | length 521.3
  Bottom Layer w15: P1.41 3827,543 4048,543 4085,580 TB1.P1_41
PD10: P1.42 TB1.P1_42 | length 521.3
  Bottom Layer w15: P1.42 4048,595 4085,632 4307.42,632 TB1.P1_42
PD11: P1.43 TB1.P1_43 | length 521.3
  Bottom Layer w15: P1.43 3827,443 4048,443 4085,480 TB1.P1_43
PD12: P1.44 TB1.P1_44 | length 521.3
  Bottom Layer w15: P1.44 4048,495 4085,532 4307.42,532 TB1.P1_44
PD13: P1.45 TB1.P1_45 | length 521.3
  Bottom Layer w15: P1.45 3827,343 4222.42,343 TB1.P1_45
PD14: P1.46 TB1.P1_46 | length 521.3
  Bottom Layer w15: P1.46 4048,395 4085,432 4307.42,432 TB1.P1_46
PD15: P1.47 TB1.P1_47 | length 521.3
  Bottom Layer w15: P1.47 3827,243 4222.42,243 TB1.P1_47
PE0: P2.17 TB1.P2_17 | length 587.8
  Bottom Layer w15: TB1.P2_17 6311.42,1728 6548,1728 6610,1790 P2.17
PE1: P2.18 TB1.P2_18 | length 587.8
  Bottom Layer w15: TB1.P2_18 6548,1780 6610,1842 6848,1842 P2.18
PE2: P2.15 TB1.P2_15 | length 587.8
  Bottom Layer w15: TB1.P2_15 6311.42,1828 6548,1828 6610,1890 P2.15
PE3: P2.16 TB1.P2_16 | length 587.8
  Bottom Layer w15: TB1.P2_16 6548,1880 6610,1942 6848,1942 P2.16
PE4: P2.13 R11.2 TB1.P2_13 | length 7052.4
  Bottom Layer w15: R11.2 400,2110 2920,2110 3355,2545 4151,2545 4164,2532 5707.42,2532 TB1.P2_13 6311.42,1928 6548,1928 6610,1990 P2.13
PE5: P2.14 R12.2 TB1.P2_14 | length 8210.6
  Top Layer w15: v1(5711,2840) 6221,2330 6295,2330 6309,2316 6309,2030.42 TB1.P2_14
  Bottom Layer w15: R12.2 621,1926 245,1926 216,1955 216,2155 259,2198 1820,2198 2078,2456 2701,2456 3085,2840 v1(5711,2840) ; TB1.P2_14 6548,1980 6610,2042 6848,2042 P2.14
PE6: P2.11 R13.2 TB1.P2_11 | length 8036.2
  Top Layer w15: R13.2 v1(1279,2154)
  Bottom Layer w15: v1(1279,2154) 2783,2154 3339,2710 6873,2710 6948,2635 6948,2471 6915,2438 6684,2438 6674,2428 6235,2428 6212,2405 6212,2127.42 TB1.P2_11 6311.42,2028 6548,2028 6610,2090 P2.11
PE7: P1.25 R23.2 TB1.P1_25 | length 3457.7
  Top Layer w15: R23.2 3702,4263 3702,1468 P1.25
  Bottom Layer w15: P1.25 3827,1343 4048,1343 4085,1380 TB1.P1_25
PE8: P1.26 R24.2 TB1.P1_26 | length 4117.1
  Top Layer w15: R24.2 3219,4344 3729,4344 3827,4246 3827,1443 P1.26
  Bottom Layer w15: P1.26 4048,1395 4085,1432 4307.42,1432 TB1.P1_26
PE9: P1.27 R25.2 TB1.P1_27 | length 4975.6
  Top Layer w15: R25.2 2799,4364 2799,4705 2847,4753 3015,4753 3079,4689 3079,4180 3283,3976 3283,3808 3653,3438 3653,1417 P1.27
  Bottom Layer w15: P1.27 3827,1243 4048,1243 4085,1280 TB1.P1_27
PE10: P1.28 TB1.P1_28 | length 521.3
  Bottom Layer w15: P1.28 4048,1295 4085,1332 4307.42,1332 TB1.P1_28
PE11: P1.29 TB1.P1_29 | length 521.3
  Bottom Layer w15: P1.29 3827,1143 4048,1143 4085,1180 TB1.P1_29
PE12: P1.30 TB1.P1_30 | length 521.3
  Bottom Layer w15: P1.30 4048,1195 4085,1232 4307.42,1232 TB1.P1_30
PE13: P1.31 TB1.P1_31 | length 521.3
  Bottom Layer w15: P1.31 3827,1043 4048,1043 4085,1080 TB1.P1_31
PE14: P1.32 TB1.P1_32 | length 521.3
  Bottom Layer w15: P1.32 4048,1095 4085,1132 4307.42,1132 TB1.P1_32
PE15: P1.33 TB1.P1_33 | length 521.3
  Bottom Layer w15: P1.33 3827,943 4048,943 4085,980 TB1.P1_33
PH0: P2.7 TB1.P2_7 | length 587.8
  Bottom Layer w15: TB1.P2_7 6311.42,2228 6548,2228 6610,2290 P2.7
PH1: P2.8 TB1.P2_8 | length 587.8
  Bottom Layer w15: TB1.P2_8 6421.42,2342 6848,2342 P2.8
VDD: P1.3 P1.4 P2.22 R1.2 R2.2 R3.2 R4.2 TB1.P1_3 TB1.P1_4 TB1.P2_22 | length 10140
  Top Layer w15: TB1.P1_4 4407,2432.42 4407,2055 4384,2032 4344.69,2032 4312,1999.31 4312,1955 4335,1932 4696,1932 5098,1530 6309.42,1530 TB1.P2_22
  Bottom Layer w15: R4.2 2837,97 2188,97 R3.2 2077,92 1433,92 R2.2 1190,145 R1.2 930,200 912,200 837,275 837,355 861,379 1152,379 1276,503 1451,503 3443,2495 P1.3 P1.4 4067,2495 4082,2480 TB1.P1_3 TB1.P1_4 ; TB1.P2_22 6548,1580 6610,1642 6848,1642 P2.22
pads on no net: HC1.1 HC1.6 P1.48 SW1.HOLE SW2.HOLE SW3.HOLE SW4.HOLE TB1.P1_48

## Polygon pours and split planes (outlines as drawn)
GND on Top Layer "Top Poly" (solid, remove dead copper, pour order 6): 0,5520 7030,5520 7030,0 25,0 0,25
GND on Bottom Layer "Bottom Poly" (solid, remove dead copper, pour order 8): 0,5520 0,0 7030,0 7030,5520

## Keep-outs
Keep-Out Layer:
  lines w5: 35,5520 7030,5520 7030,0 0,0 0,5520 45,5520

## Silkscreen, mask and mechanical layers (free items; w line width, h text height)
Top Overlay:
  lines w5: 50,3395 1340,3395 ; 1825,4070 1825,5390 ; 1845,1645 1845,2740 ; 2315,3395 3725,3395
  lines w10: 40,2765 1260,2765 1375,2650 1375,1660 ; 65,4030 1170,4030 1300,4160 1300,5385 ; 2320,1650 2320,2650 2435,2765 3690,2765 ; 2325,5380 2325,4165 2465,4025 3715,4025

## Text inside footprints (layer, text, board x,y; h text height)
P1: Top Overlay "2" at 3855,2695 h50 r270; Top Overlay "1" at 3755,2695 h50 r270; Top Overlay "49" at 3755,115 h50 r270; Top Overlay "50" at 3855,115 h50 r270
P2: Top Overlay "2" at 6880,2690 h50 r270; Top Overlay "1" at 6780,2690 h50 r270; Top Overlay "49" at 6780,110 h50 r270; Top Overlay "50" at 6880,110 h50 r270